# Altium PCB PCB_Final.PcbDoc
Units mil, origin at the board's own origin, x right, y up, seen from the top; angles counter-clockwise.
Board outline 1255 x 1415 mil, 2 copper layers (Top Layer, Bottom Layer); 15 components, 18 nets, 47 pads, 2 vias.
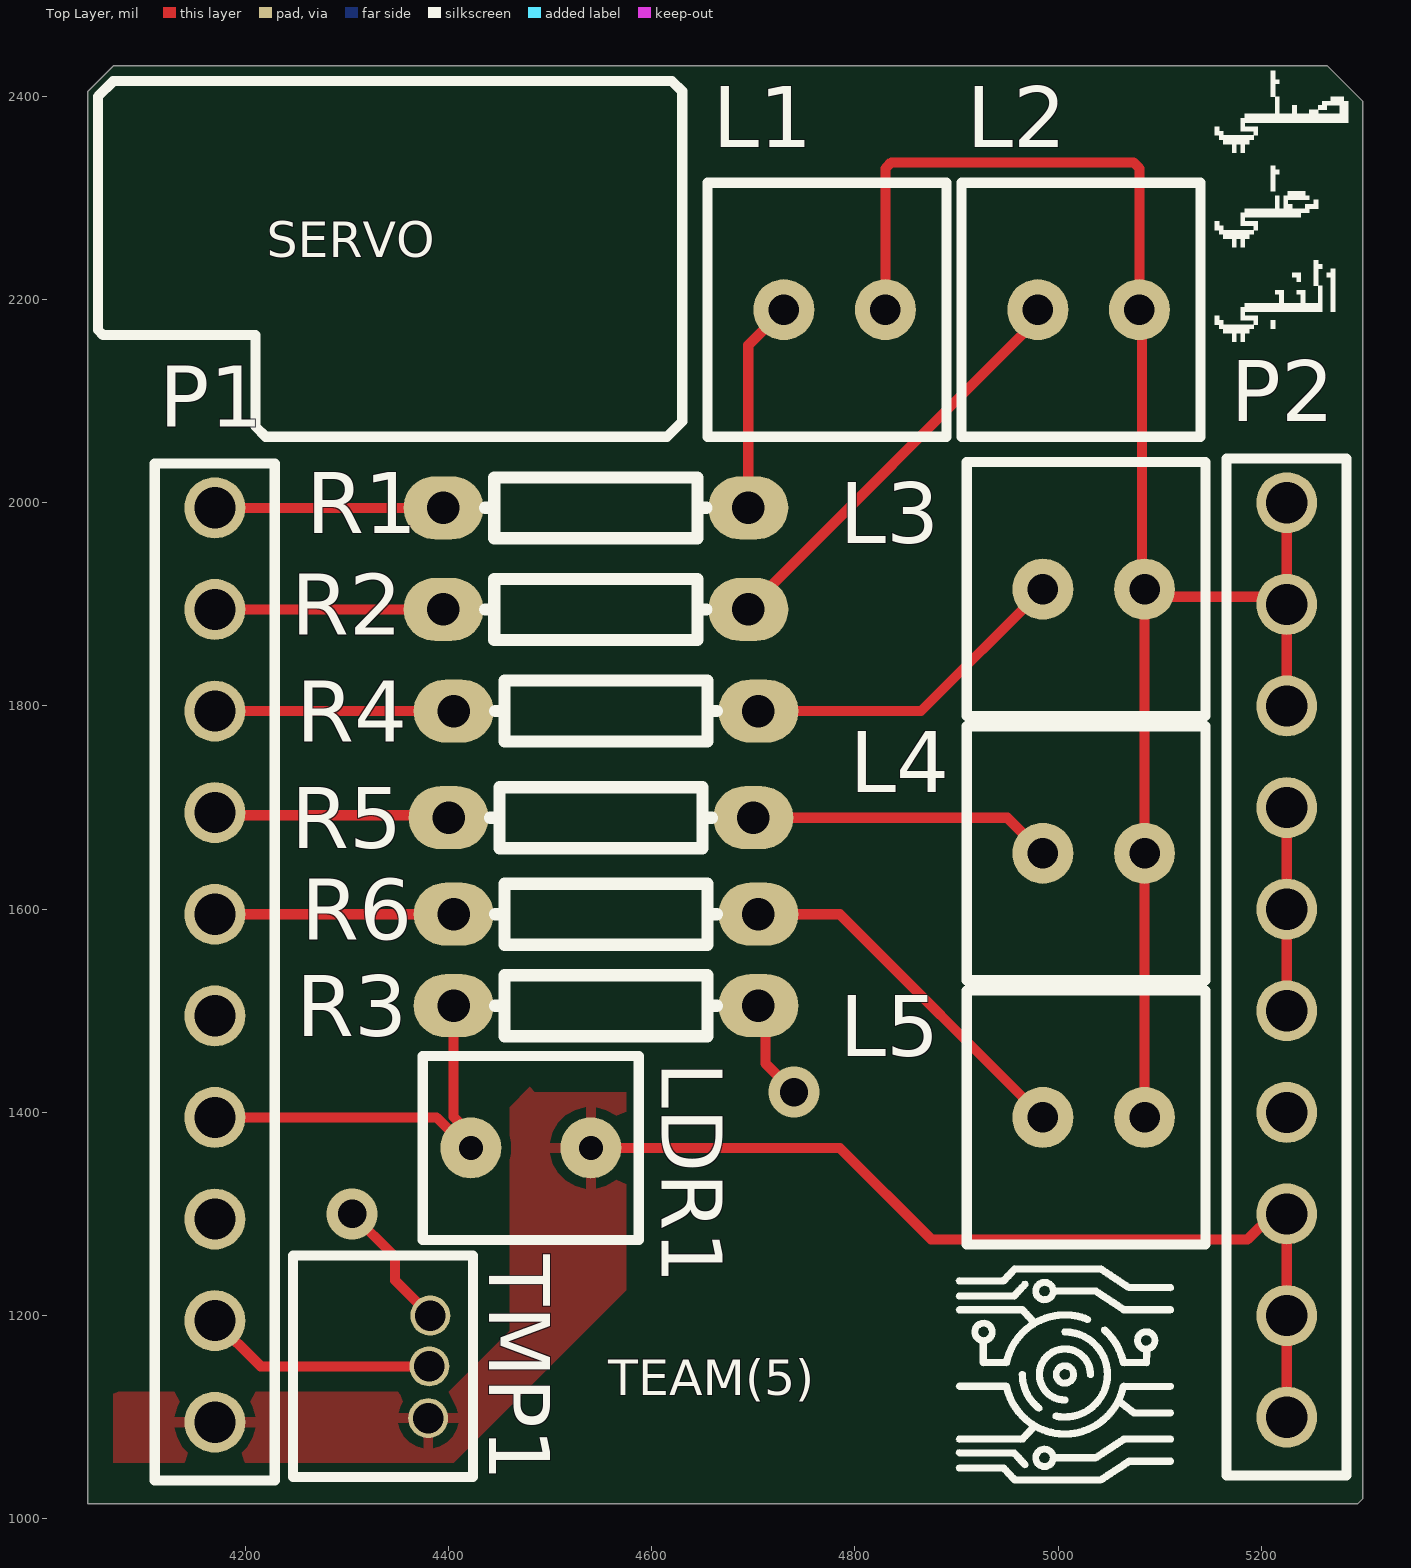
[diagram p0: Top Layer view]
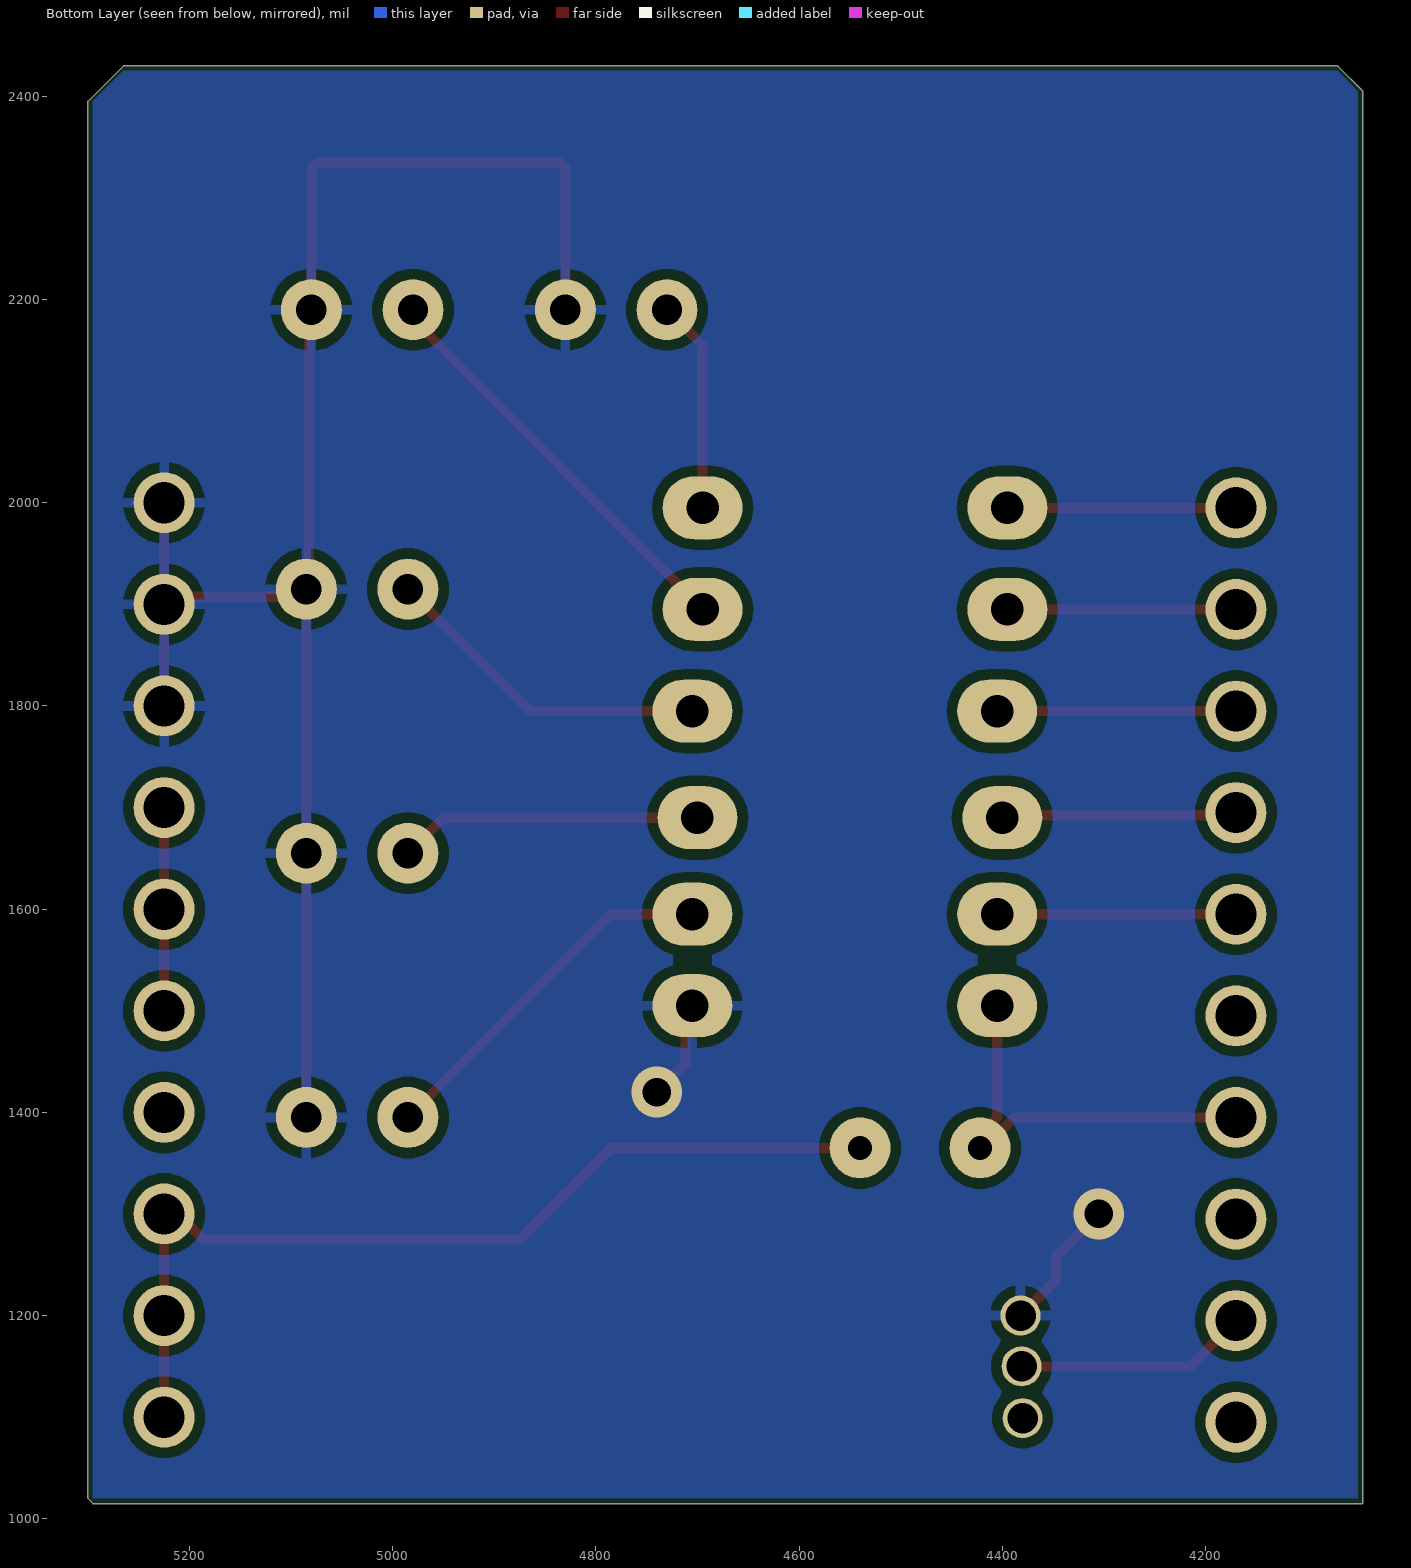
[diagram p1: Bottom Layer view, seen from below]
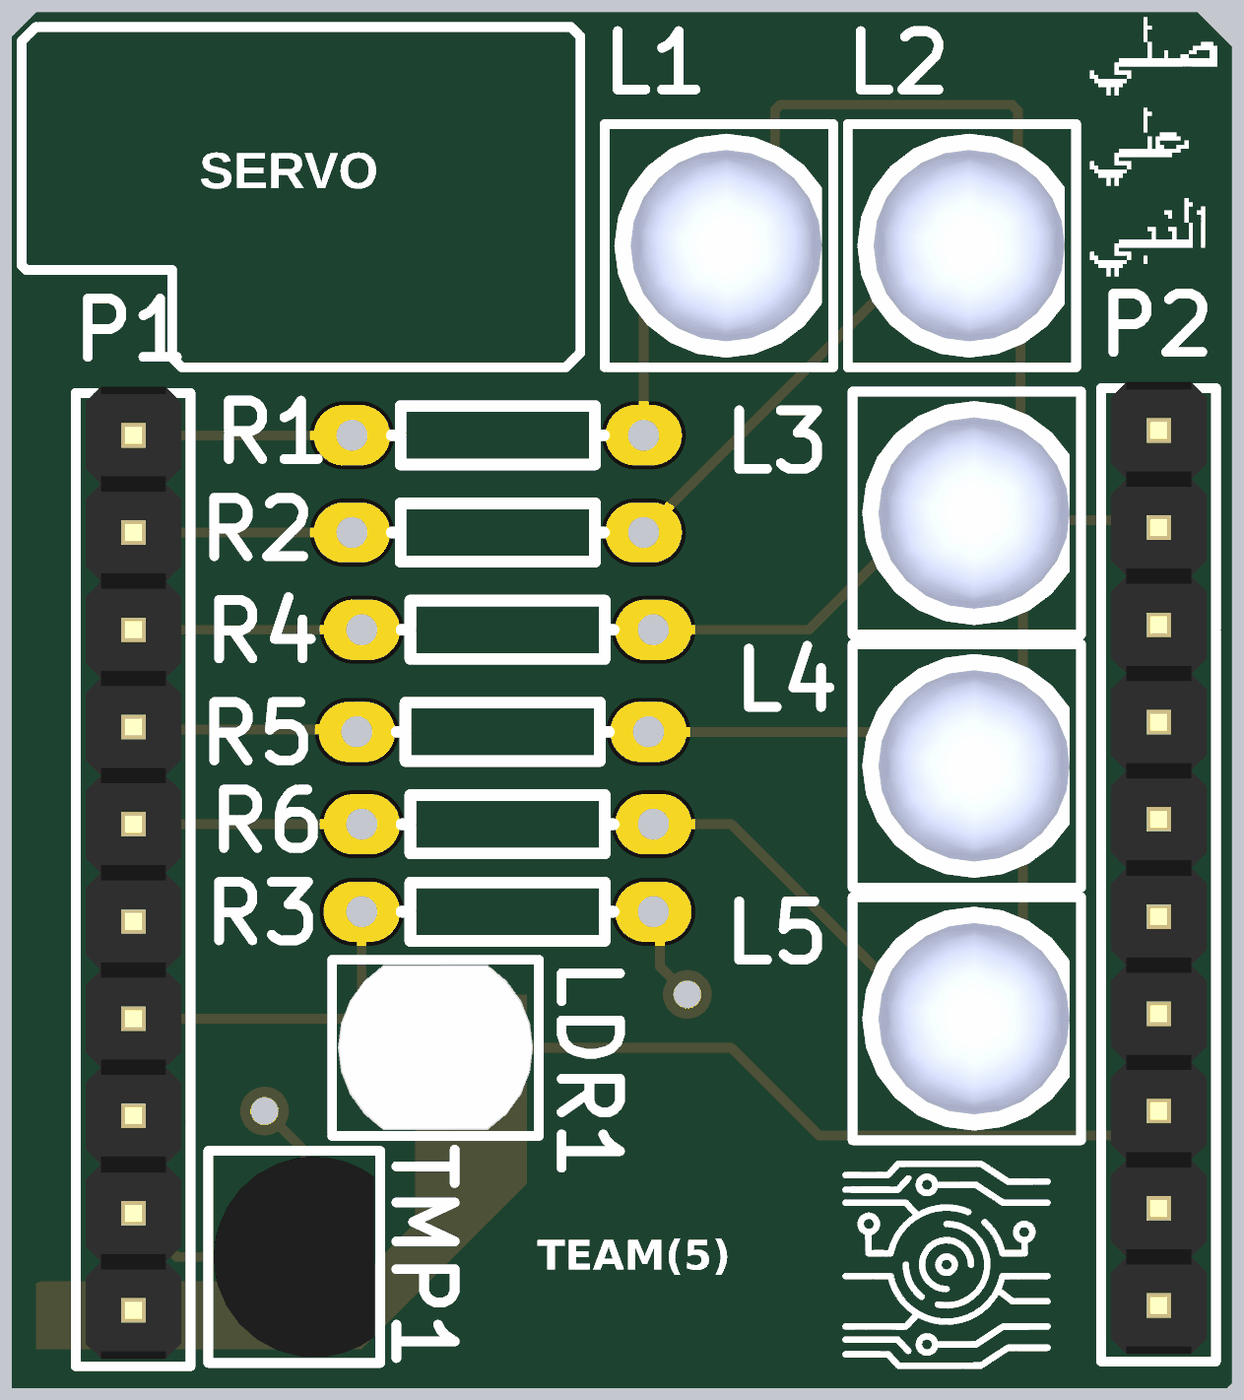
[diagram p2: 3D render of the assembled board from above, using the file's embedded part models]

## Layer stack, top to bottom
Top Solder: solder mask 0.4, Solder Resist, Dk 3.5
Top Layer: signal copper 1.4
Dielectric 1: dielectric 12.6, FR-4, Dk 4.8
Bottom Layer: signal copper 1.4
Bottom Solder: solder mask 0.4, Solder Resist, Dk 3.5

## Board outline
4045,1015 4045,2405 4070,2430 5265,2430 5300,2395 5300,1020 5295,1015

## Design rules (kind name [scope] priority, off if disabled: settings)
Clearance [All] p1: gap=10 ignorepadtopadclearanceinfootprint=FALSE
PolygonConnect [All] p1: connectstyle=Relief reliefconductorwidth=10 reliefentries=4 polygonreliefangle="90 Angle" airgapwidth=10
RoutingVias [All] p1: holewidth=28 width=50 viastyle="Through Hole" minholewidth=28 minwidth=50 maxholewidth=28 maxwidth=50
SolderMaskExpansion [All] p1: expansion=4 istentingtop=FALSE
SupplyNets "Schematic Supply Nets_2" [InNet('GND')] p1: voltage=0.000
SupplyNets "Schematic Supply Nets_1" [InNet('3V3')] p2: voltage=0.000
SupplyNets "Schematic Supply Nets" [InNet('5V')] p3: voltage=0.000
Width [All] p1: maxlimit=10 minlimit=10 preferedwidth=10
30 further rules are at their usual default settings.

## Components (designator, comment, footprint, x,y, rotation, side; value= is the part's Value field where it differs from the comment)
L1 "G" Led 4780,2190 r0 top
L2 "w" Led 5030,2190 r0 top
L3 "R" Led 5035,1915 r0 top
L4 "R" Led 5035,1655 r0 top
L5 "R" Led 5035,1395 r0 top
LDR1 "LDR" LDR 4421.89,1365 r270 top
P1 "I/O" "pin headers" 4170,1995 r270 top
P2 "I/O" "pin headers" 5225,2000 r270 top
R1 "220" AXIAL0.3 4395,1995 r0 top
R2 "220" AXIAL0.3 4395,1895 r0 top
R3 "220" AXIAL0.3 4705,1505 r180 top
R4 "220" AXIAL0.3 4405,1795 r0 top
R5 "220" AXIAL0.3 4400,1690 r0 top
R6 "220" AXIAL0.3 4405,1595 r0 top
TMP1 "LM35DZ" LM35DZ 4370,1150 r90 top

## Footprints (in the part's own frame and the unit in brackets; to place one, negate y for a bottom-side part, rotate by r counter-clockwise, add the part's x,y. Pads: shape width x height; smd on the part's side, far side on the other; paste and mask are expansions set on the pad)
AXIAL0.3 [mil]
  oval 78.74x62 hole 32: 1(0,0) 2(300,0)
  silkscreen extent 41,-30 259,30
LDR [mil]
  round 60 hole 23.62: 1(0,0) 2(0,118.11)
  silkscreen extent -91,-47 91,165, body extent -85,-41 84,159, height 130
Led [mil]
  round 60 hole 30: 1(-50,0) 2(50,0)
  silkscreen extent -125,-125 110,125, body extent -115,-115 98,115, height 341
LM35DZ [mm]
  round 1 hole 0.765: 1(1.27,-0.305) 2(0,-0.279) 3(-1.295,-0.254)
  silkscreen extent -2.77,-1.37 2.77,3.12, body extent -2.62,-1.21 2.62,2.98, height 6.6
"pin headers" [mil]
  round 60 hole 40.55: 1(0,0) 2(100,0) 3(200,0) 4(300,0) 5(400,0) 6(500,0) 7(600,0) 8(700,0) 9(800,0) 10(900,0)
  silkscreen extent -43,-59 957,59, body extent -50,-49 950,49, height 394

## Part data
L1 L2 L3 L4 L5: library part G_Led, Supplier=Maker
LDR1: "540nm 100kΩ~200kΩ 10MΩ Through Hole,P=3mm Photoresistors ROHS", Manufacturer="Senba Sensing Tech", Mfr. Part #=GL5549, ComponentLink1Description=Datasheet, ComponentLink1URL=https://www.lcsc.com/datasheet/C125631.pdf, Supplier=LCSC, Supplier. part #=C125631
P1 P2: library part "Pin Headers", "250V 3A Through Hole Pin Header 2.5mm 4P 6mm -40℃~+105℃ 3mm 2.54mm 1 Black 1x4P Through Hole,P=2.54mm Pin Headers ROHS", Manufacturer=XFCN, Mfr. Part #=PZ254V-11-04P, ComponentLink1Description=Datasheet, ComponentLink1URL=https://www.lcsc.com/datasheet/C2691448.pdf, ComponentLink2Description="Link of component", ComponentLink2URL=https://www.lcsc.com/product-detail/C2691448.html?s_z=n_pin%2520header, Supplier=LCSC, Supplier Part #=C2691448
R1 R2 R3 R4 R5 R6: library part RES1
TMP1: "±1.5℃ TO-92 Temperature Sensors ROHS", Manufacturer=TI, Mfr. Part #=LM35DZ/NOPB, ComponentLink1Description=Datasheet, ComponentLink1URL=https://www.lcsc.com/datasheet/C12165.pdf, Supplier=LCSC, Supplier. part #=C12165

## Via types
v1: diameter 50, hole 28, Top Layer to Bottom Layer, tented both sides, 2 vias

## Nets (pads, with @x,y where several pads share a name; then routed paths per layer and width w, separated by ;. In a path a pad name is that pad's centre, name@x,y a point inside that pad or via, vN(x,y) a via of type N, cw(c..) or ccw(c..) an arc to the next point about the centre after c; other vN are vias at no path point)
3V3: P2.4 P2.5 P2.6 | length 200
  Top Layer w10: P2.6 P2.5 P2.4
5V: LDR1.2 P1.10 P2.8 P2.9 P2.10 TMP1.3 | length 934
  Top Layer w10: TMP1.3 TMP1.3@4380.5,1099.5 ; LDR1.2 4785,1365 4875,1275 5186.47,1275 5211.47,1300 P2.8 P2.9 P2.10 P2.10@5224.5,1099.5
ECHO: P1.8
G: P1.1 R1.1 | length 225
  Top Layer w10: P1.1 R1.1
GND: L1.2 L2.2 L3.2 L4.2 L5.2 P2.1 P2.2 P2.3 R3.1 TMP1.1 | length 1907.8
  Top Layer w10: v1(4305,1300) 4347.22,1257.78 4347.22,1234.78 TMP1.1 ; R3.1 4711.82,1498.18 4711.82,1448.39 4740,1420.22 v1(4740,1420) ; L1.2 4830,2329.14 4835.86,2335 5074.14,2335 5080,2329.14 L2.2 5082.5,2187.5 5082.5,1917.5 L3.2 ; L5.2 L4.2 L3.2 ; P2.3 P2.2 ; P2.1 P2.2 ; L3.2 5092.5,1907.5 5217.5,1907.5 P2.2
LDR: LDR1.1 P1.7 R3.2 | length 411.3
  Top Layer w10: P1.7 4388.25,1395 4418.25,1365 LDR1.1 4421.89,1378.53 4405,1395.42 R3.2
NetL1_1: L1.1 R1.2 | length 209.5
  Top Layer w10: R1.2 4695,2155 L1.1
NetL2_1: L2.1 R2.2 | length 413.1
  Top Layer w10: R2.2 4695,1895.82 4980,2180.82 L2.1
NetL3_1: L3.1 R4.2 | length 329.7
  Top Layer w10: R4.2 4865,1795 L3.1
NetL4_1: L4.1 R5.2 | length 299.5
  Top Layer w10: R5.2 4950,1690 L4.1
NetL5_1: L5.1 R6.2 | length 362.8
  Top Layer w10: R6.2 4785,1595 L5.1
R1: P1.3 R4.1 | length 235
  Top Layer w10: P1.3 R4.1
R2: P1.4 R5.1 | length 232.1
  Top Layer w10: P1.4 4172.5,1692.5 4397.5,1692.5 R5.1
R3: P1.5 R6.1 | length 235
  Top Layer w10: P1.5 R6.1
servo: P2.7
temSignal: P1.9 TMP1.2 | length 229.6
  Top Layer w10: P1.9 4215,1150 TMP1.2
TRIG: P1.6
W: P1.2 R2.1 | length 225
  Top Layer w10: P1.2 R2.1

## Polygon pours and split planes (outlines as drawn)
5V on Top Layer "5V_L01_P000" (solid, remove dead copper, pour order 0): 4070,1055 4405,1055 4575,1225 4575,1420 4485,1420 4480,1425 4460,1405 4460,1185 4400,1125 4075,1125 4070,1130
GND on Bottom Layer "GND_L02_P004" (solid, remove dead copper, pour order 4): 4050,2405 4070,2425 5265,2425 5295,2395 5295,1020 4050,1020

## Silkscreen, mask and mechanical layers (free items; w line width, h text height)
Top Overlay:
  drawing of 37 lines, arcs and shapes, not listed
  text "SERVO" at 4221.27,2230 h60
  text "TEAM(5)" at 4557.36,1110 h60
Mechanical 1:
  the board outline again, w10
Mechanical 29:
  the board outline again, w10

## Dimensions
4045,2405 to 5300,2395 on Mechanical 16
5265,2430 to 5300,1020 on Mechanical 16